# Altium PCB PCB1.PcbDoc
Units mm, origin at the board's own origin, x right, y up, seen from the top; angles counter-clockwise.
Board outline 50 x 50 mm, 2 copper layers (Top Layer, Bottom Layer); 8 components, 5 nets, 24 pads, 0 vias.
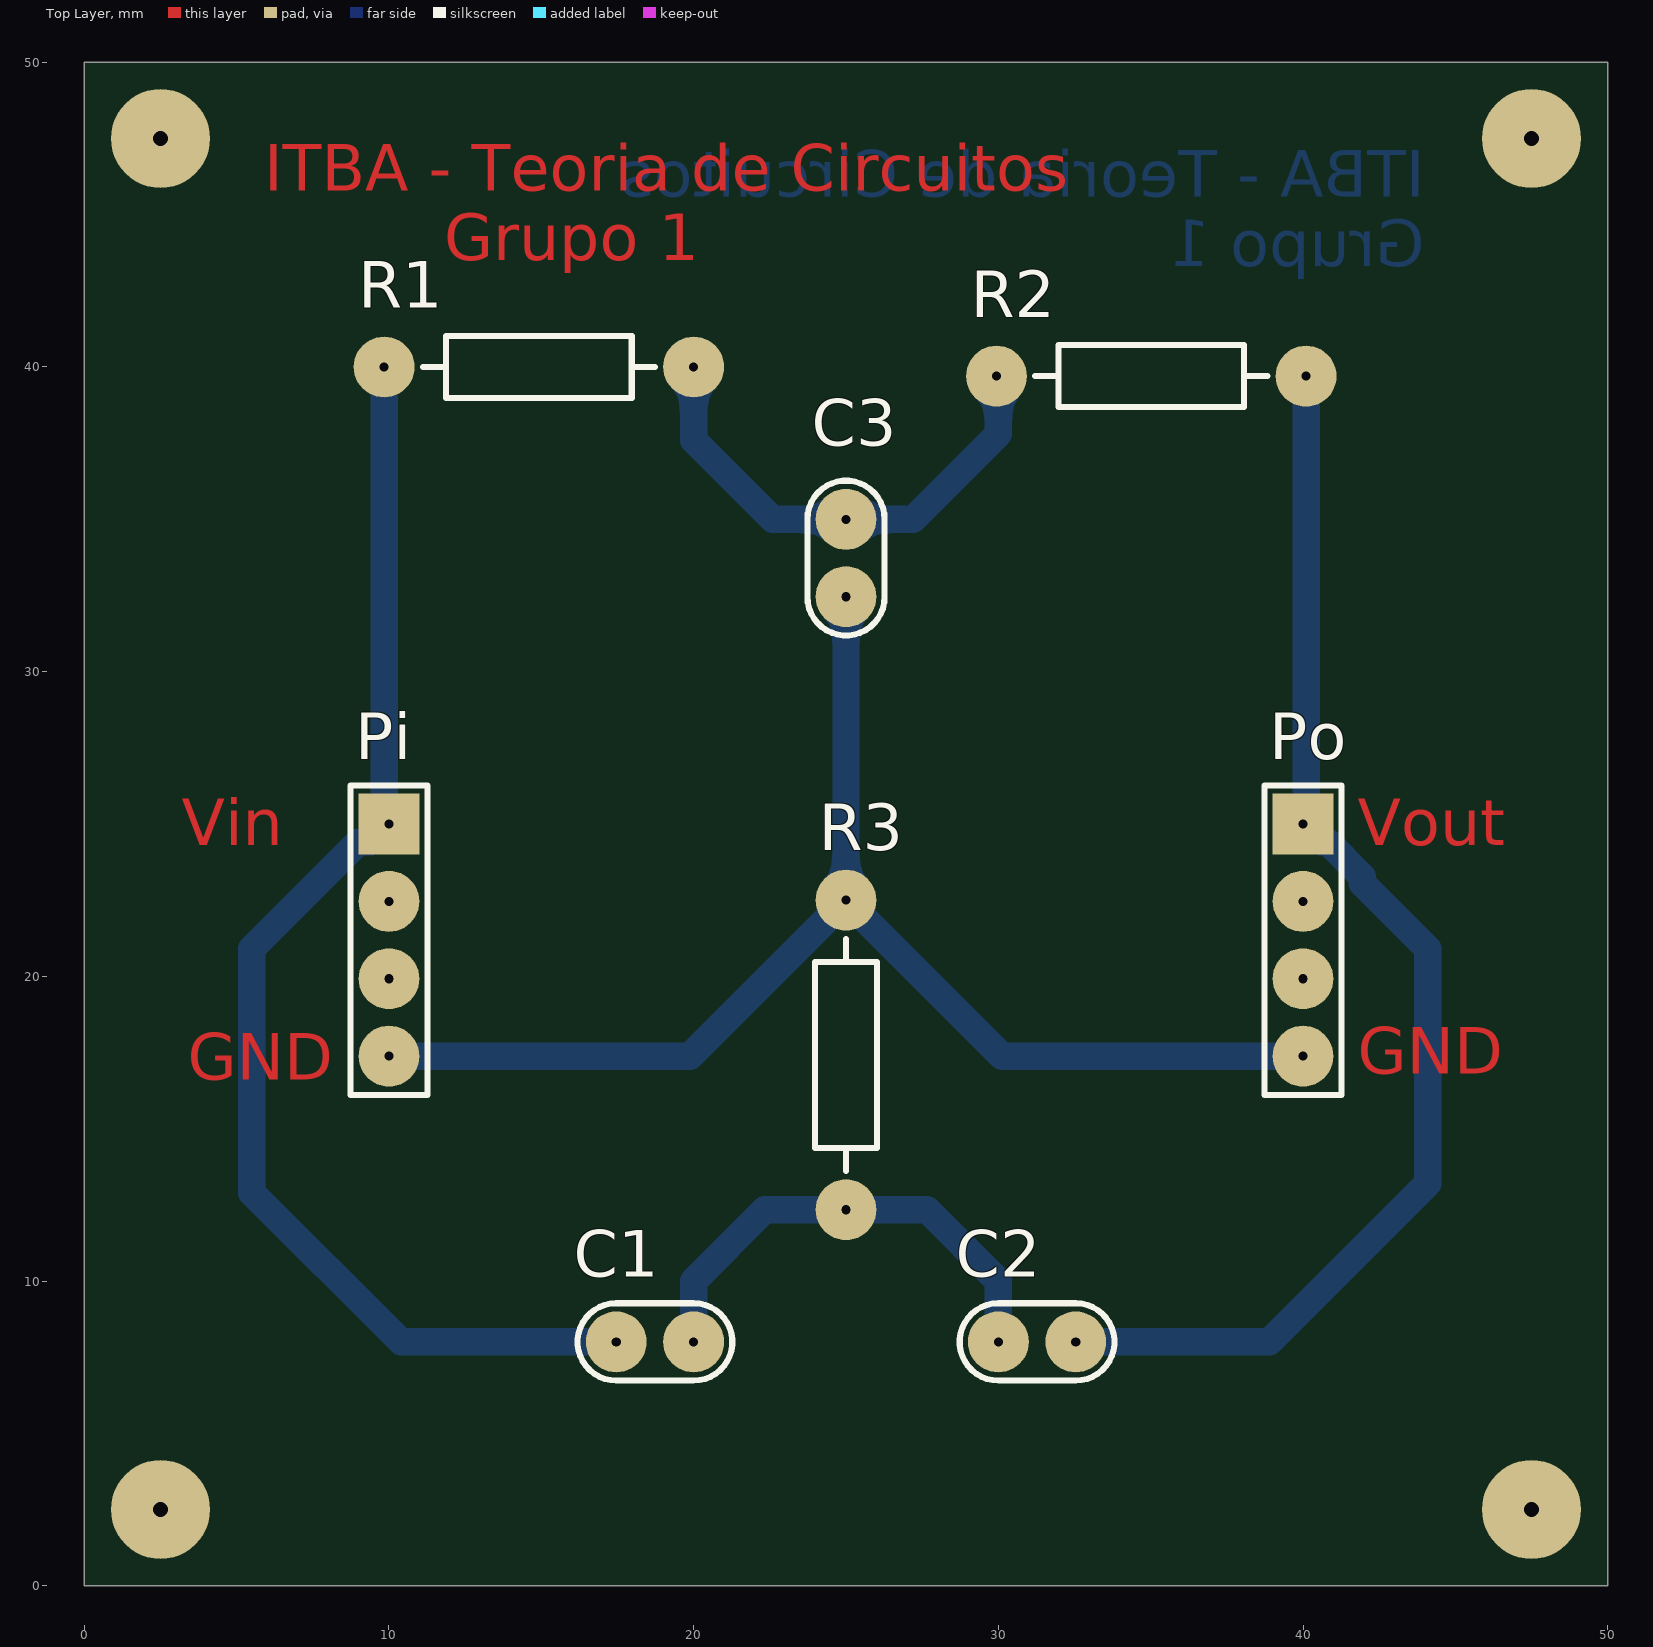
[diagram p0: Top Layer view]
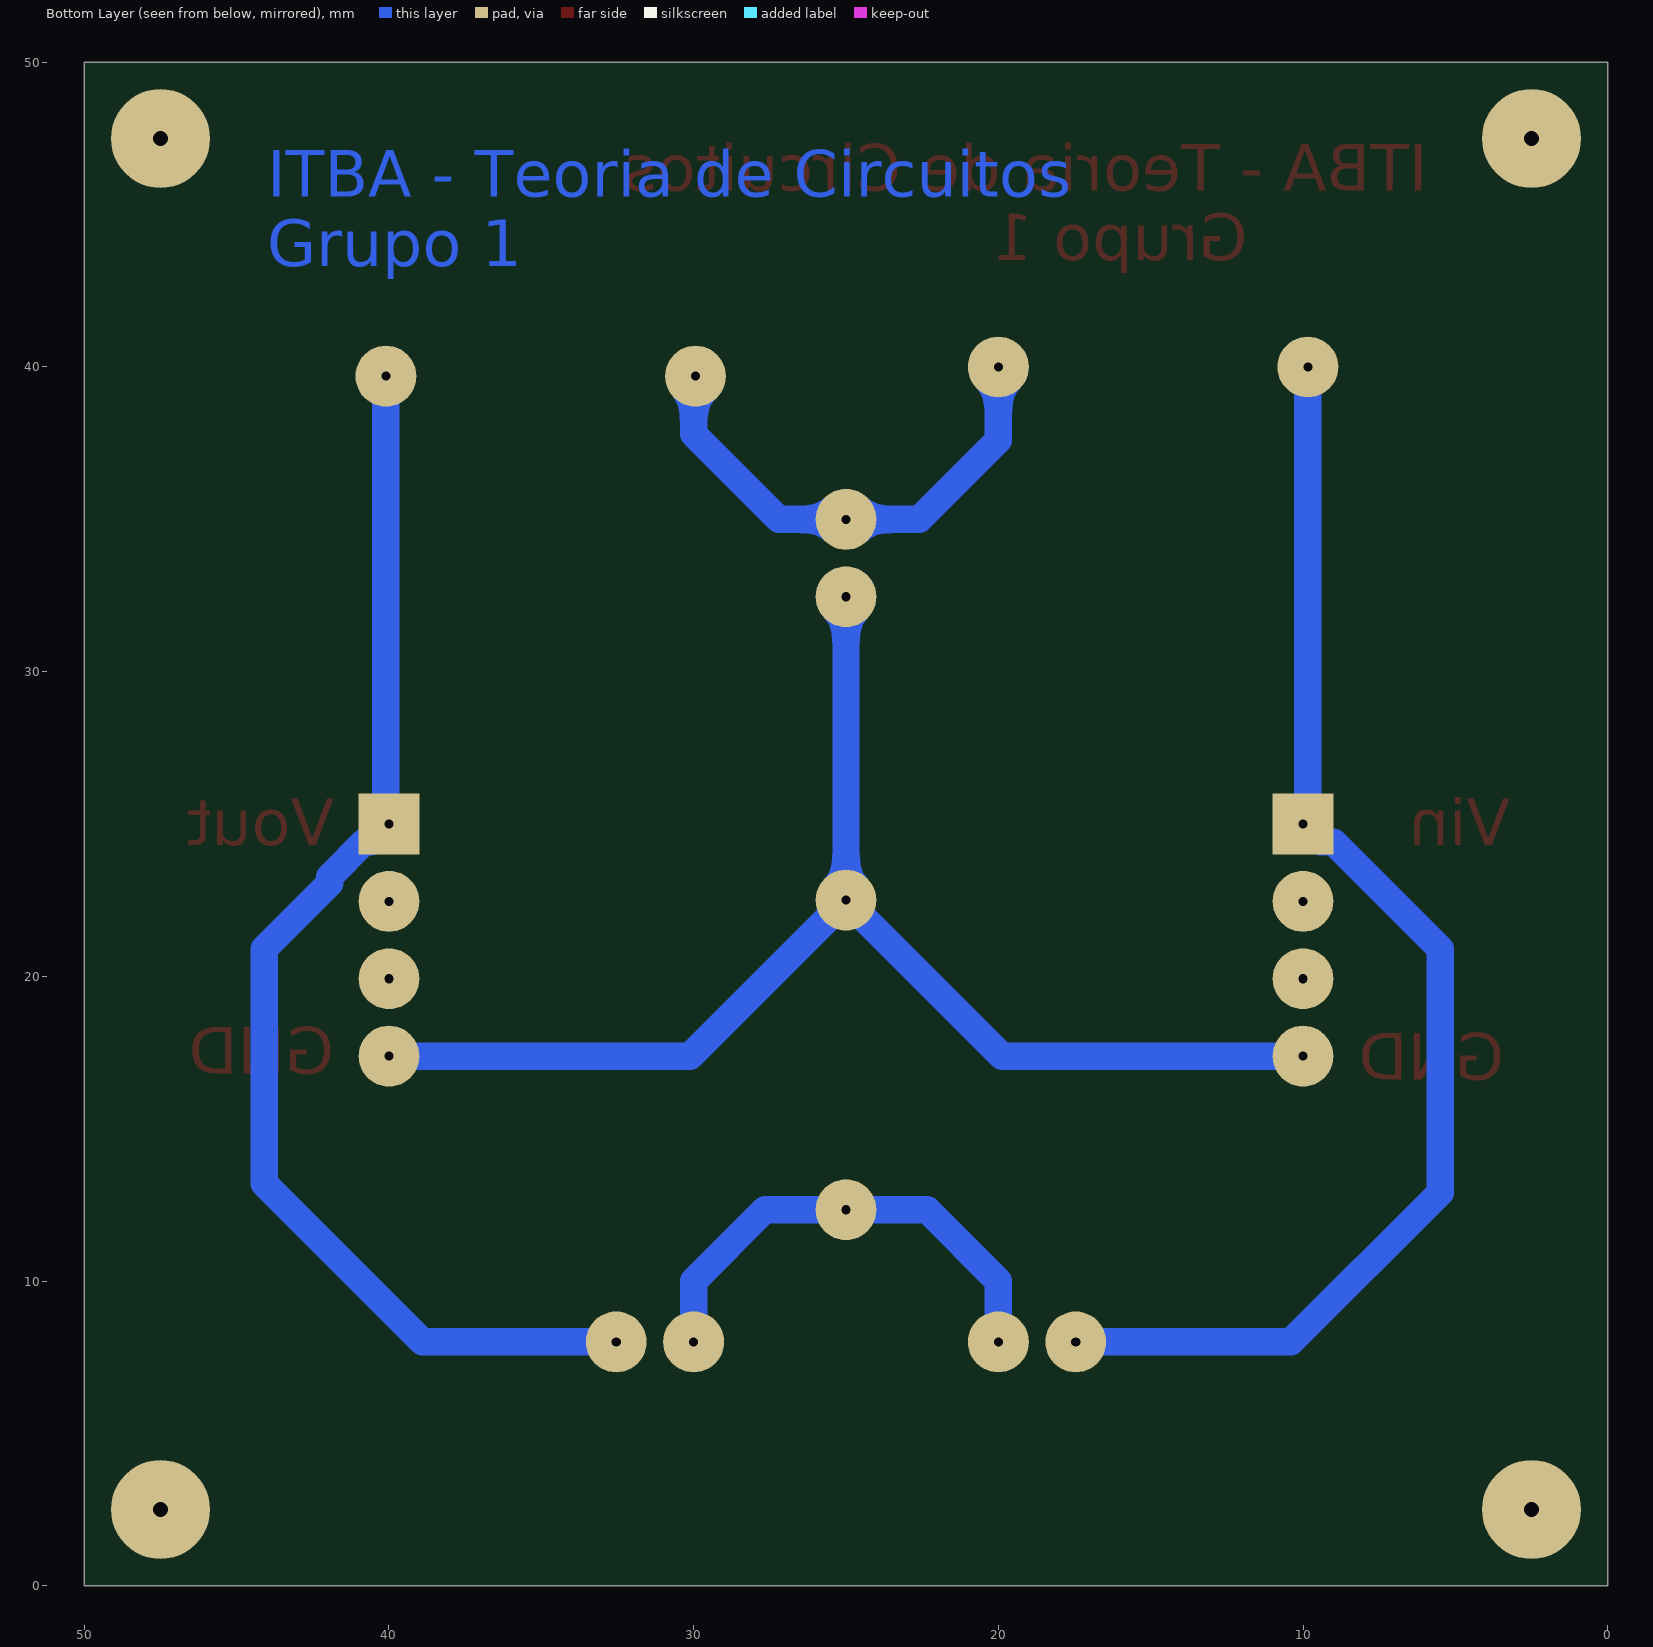
[diagram p1: Bottom Layer view, seen from below]
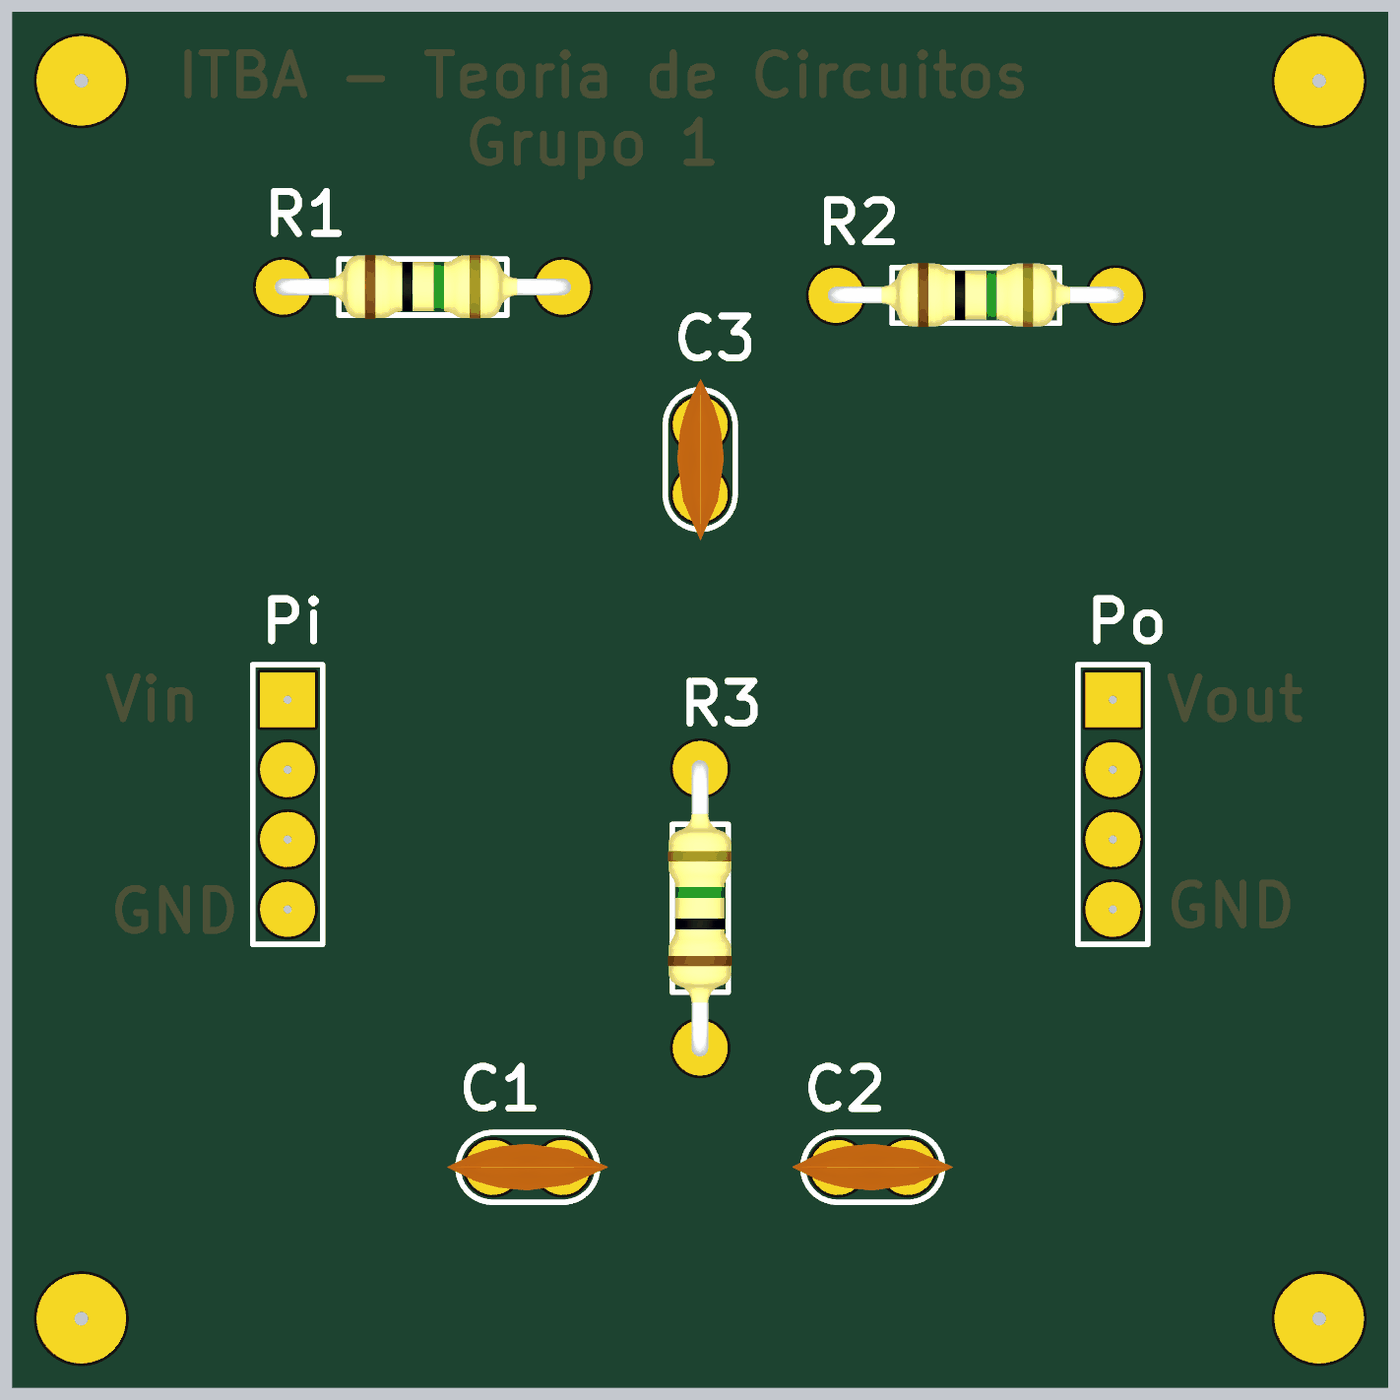
[diagram p2: 3D render of the assembled board from above, using the file's embedded part models]

## Layer stack, top to bottom
Top Solder: solder mask 0.0102, Solder Resist, Dk 3.5
Top Layer: signal copper 0.0356
Dielectric 1: dielectric 0.32, FR-4, Dk 4.8
Bottom Layer: signal copper 0.0356
Bottom Solder: solder mask 0.0102, Solder Resist, Dk 3.5

## Board outline
0,0 50,0 50,50 0,50

## Design rules (kind name [scope] priority, off if disabled: settings)
Clearance [All] p1: gap=0.5 ignorepadtopadclearanceinfootprint=FALSE
PolygonConnect [All] p1: connectstyle=Relief reliefconductorwidth=0.254 reliefentries=4 polygonreliefangle="90 Angle" airgapwidth=0.254
RoutingVias [All] p1: holewidth=0.5 width=2 viastyle="Through Hole" minholewidth=0.5 minwidth=2 maxholewidth=0.5 maxwidth=2
SolderMaskExpansion [All] p1: expansion=0.102
Width [All] p1: maxlimit=0.9 minlimit=0.6 preferedwidth=0.9
30 further rules are at their usual default settings.

## Classes and differential pairs
component class Sheet1: C1 C2 C3 Po R1 R2 R3

## Components (designator, comment, footprint, x,y, rotation, side; value= is the part's Value field where it differs from the comment)
C1 "CAP" CAP100 18.73,8 r0 top
C2 "CAP" CAP100 31.27,8 r0 top
C3 "CAP" CAP100 25,33.73 r270 top
Pi "Header 4" HDR1X4 10,25 r270 top
Po "Header 4" HDR1X4 40,25 r270 top
R1 "RES" RES400 9.84,40 r0 top
R2 "RES" RES400 29.94,39.7 r0 top
R3 "RES" RES400 25,12.34 r90 top

## Footprints (in the part's own frame and the unit in brackets; to place one, negate y for a bottom-side part, rotate by r counter-clockwise, add the part's x,y. Pads: shape width x height; smd on the part's side, far side on the other; paste and mask are expansions set on the pad)
CAP100 [mm]
  round 2 hole 0.3: 1(-1.27,0) 2(1.27,0)
  silkscreen extent -2.54,-1.27 2.54,1.27, body extent -2.92,-0.84 2.92,0.86, height 6.12
HDR1X4 [mm] "Connector; Header; 4 Position"
  rect 2x2 hole 0.3: 1(0,0)
  round 2 hole 0.3: 2(2.54,0) 3(5.08,0) 4(7.62,0)
  silkscreen extent -1.27,-1.27 8.89,1.27
RES400 [mm]
  round 2 hole 0.3: 1(0,0) 2(10.16,0)
  silkscreen extent 1.27,-1.02 8.89,1.02, body extent -0.3,-1.14 10.46,1.17, height 2.43

## Part data
Pi Po: "Header, 4-Pin", LatestRevisionDate=17-Jul-2002, LatestRevisionNote="Re-released for DXP Platform.", Publisher="Altium Limited"

## Free pads (board coordinates)
  round 3.25 hole 0.5: 1(47.5,2.5) 2(47.5,47.5) 3(2.5,47.5) 4(2.5,2.5)

## Nets (pads, with @x,y where several pads share a name; then routed paths per layer and width w, separated by ;. In a path a pad name is that pad's centre, name@x,y a point inside that pad or via, vN(x,y) a via of type N, cw(c..) or ccw(c..) an arc to the next point about the centre after c; other vN are vias at no path point)
GND: C3.2 Pi.4 Po.4 R3.2 | length 44.2
  Bottom Layer w0.9: Pi.4 19.88,17.38 R3.2 ; C3.2 R3.2 ; Po.4 30.12,17.38 R3.2
NetC1_2: C1.2 C2.1 R3.1 | length 15.9
  Bottom Layer w0.9: C1.2 20,10 22.34,12.34 R3.1 27.66,12.34 30,10 C2.1
NetC3_1: C3.1 R1.2 R2.1 | length 16.8
  Bottom Layer w0.9: R1.2 20,37.6 22.6,35 C3.1 27.2,35 30,37.8 R2.1@30,40
Vi: C1.1 Pi.1 R1.1 | length 43.3
  Bottom Layer w0.9: R1.1 9.84,25.16 Pi.1 9.41,24.41 9.01,24.41 5.5,20.9 5.5,12.9 10.4,8 C1.1
Vo: C2.2 Po.1 R2.2 | length 42.1
  Bottom Layer w0.9: C2.2 38.9,8 44.1,13.2 44.1,20.9 41.95,23.05 41.95,23.268 40.808,24.41 40.59,24.41 Po.1 40.1,25.1 R2.2
pads on no net: Pi.2 Pi.3 Po.2 Po.3

## Other copper
Top Layer:
  text "ITBA - Teoria de Circuitos /          Grupo 1" at 5.9,43.5 h1.52
  text "Vin" at 3.2,24.3 h1.52
  text "Vout" at 41.8,24.3 h1.52
  text "GND" at 41.8,16.8 h1.52
  text "GND" at 3.4,16.6 h1.52
Bottom Layer:
  text "ITBA - Teoria de Circuitos / Grupo 1" at 44,43.3 h1.52

## Silkscreen, mask and mechanical layers (free items; w line width, h text height)
Mechanical 1:
  the board outline again, w0.1